# Altium PCB PCB_CAN_shield.PcbDoc
Units mil, origin at the board's own origin, x right, y up, seen from the top; angles counter-clockwise.
Board outline 2200 x 2200 mil, 2 copper layers (Top Layer, Bottom Layer), stack 61.811 mil thick; 18 components, 13 nets, 99 pads, 23 vias.
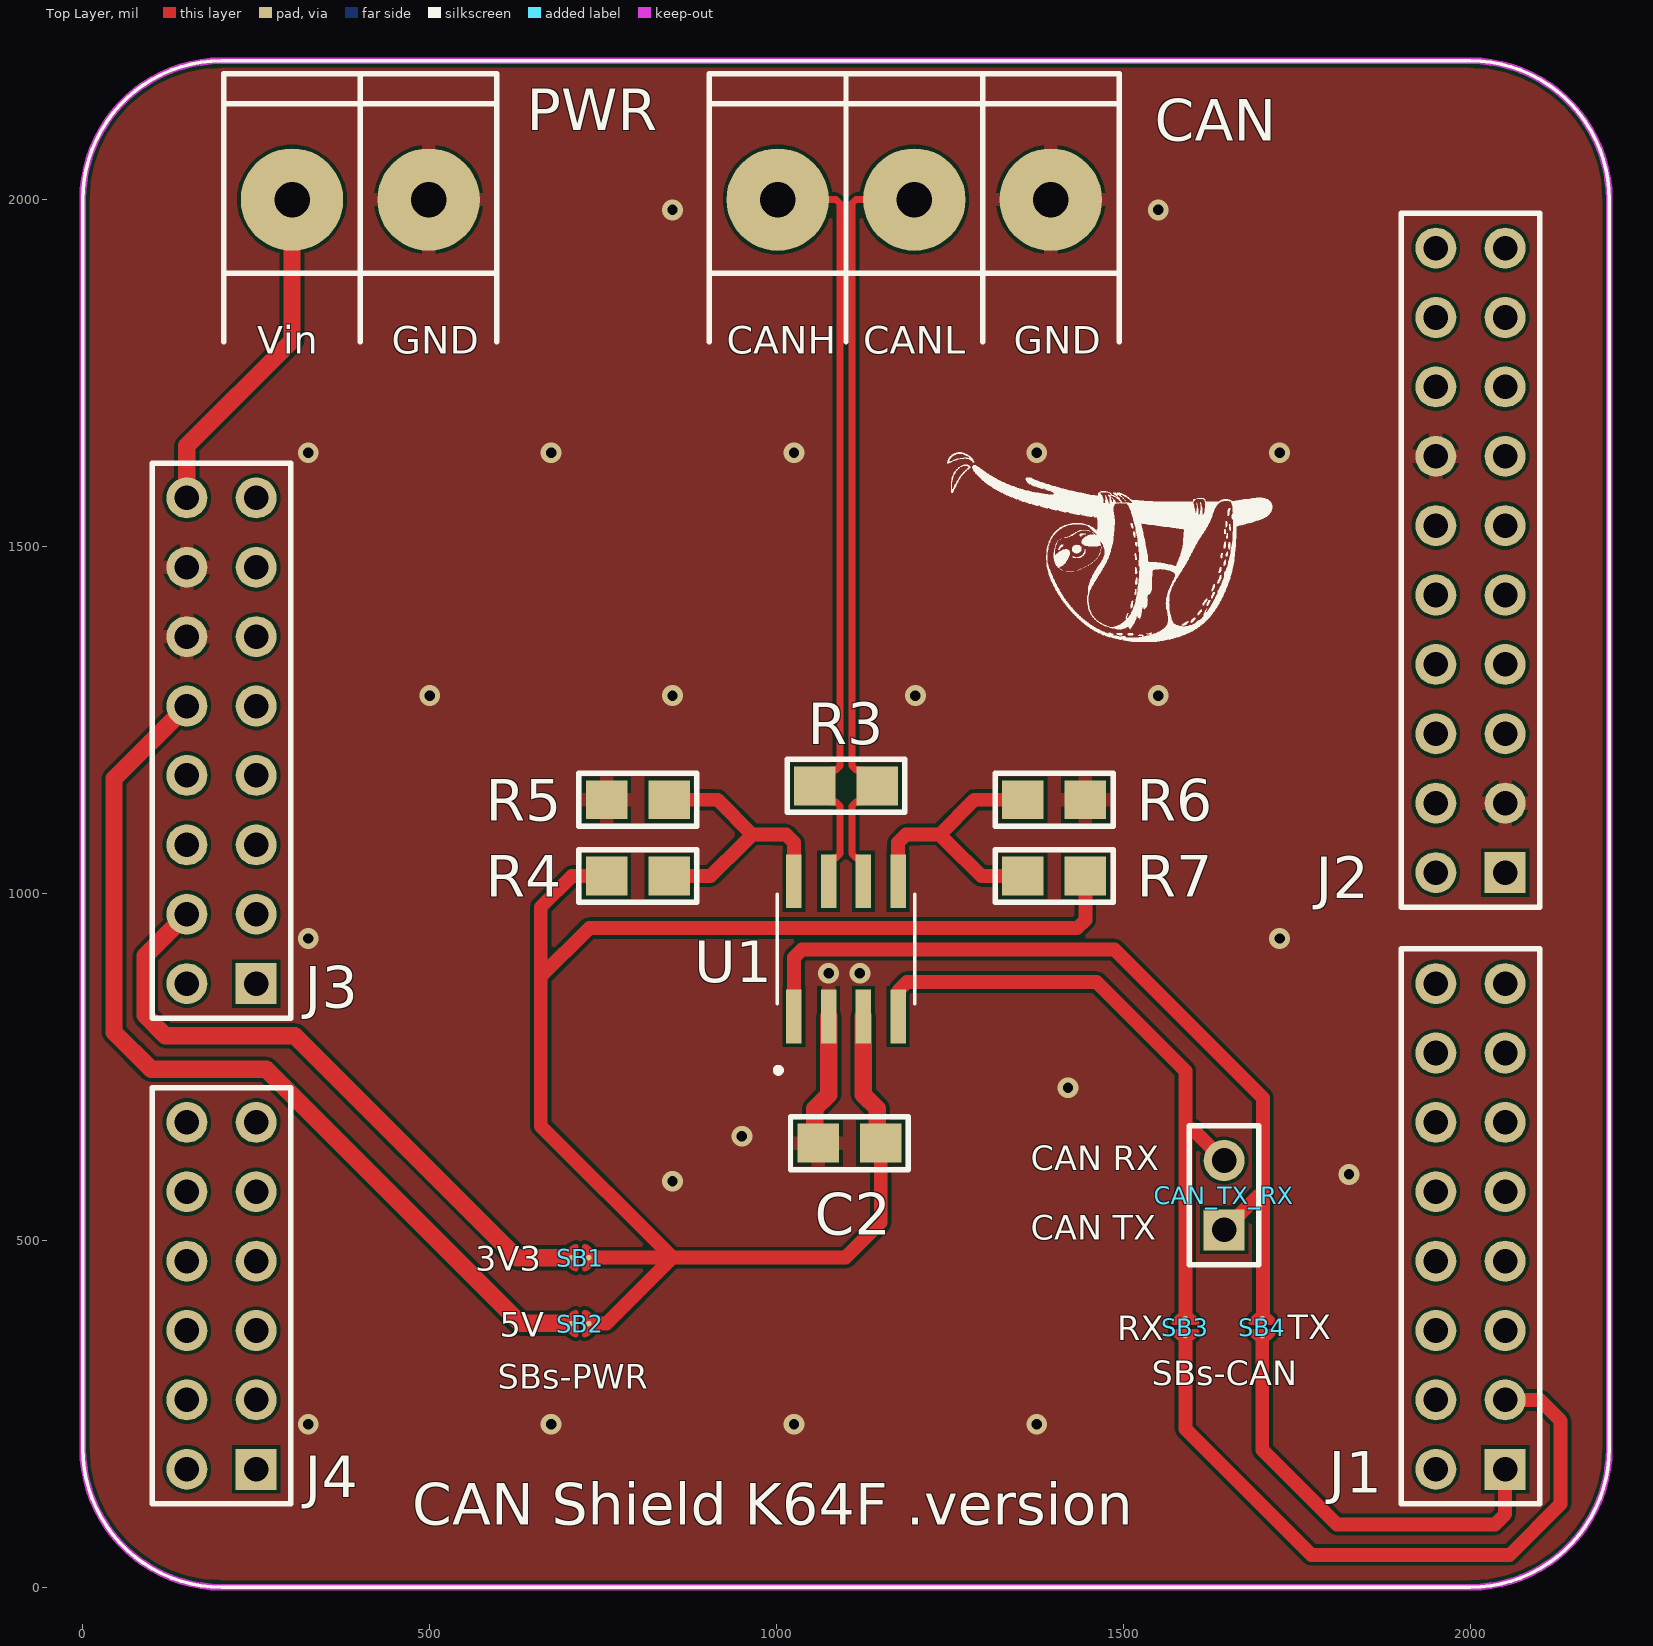
[diagram p0: Top Layer view]
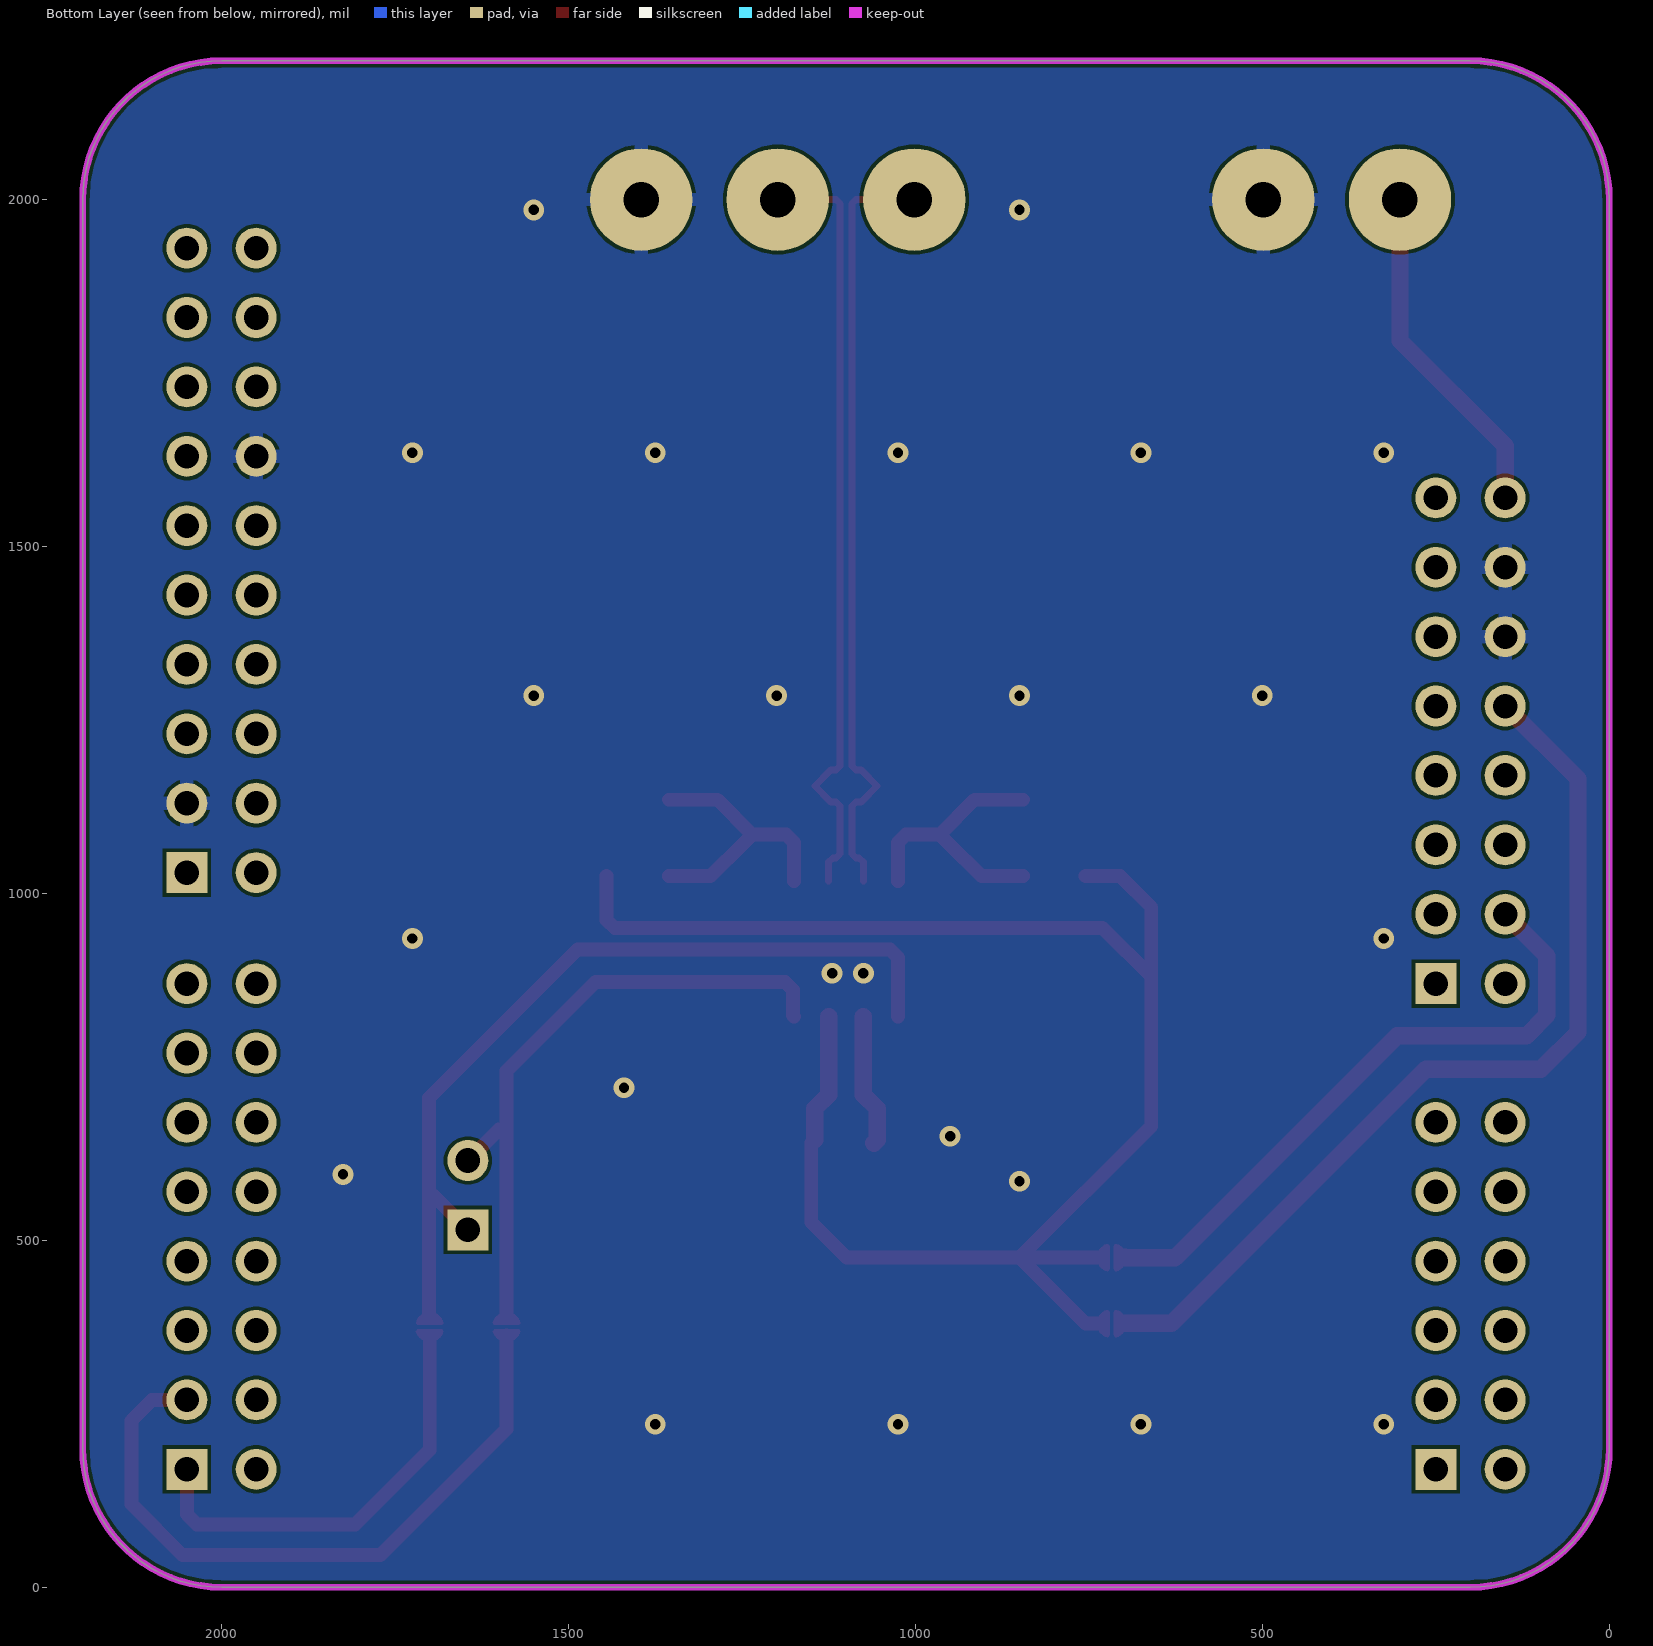
[diagram p1: Bottom Layer view, seen from below]
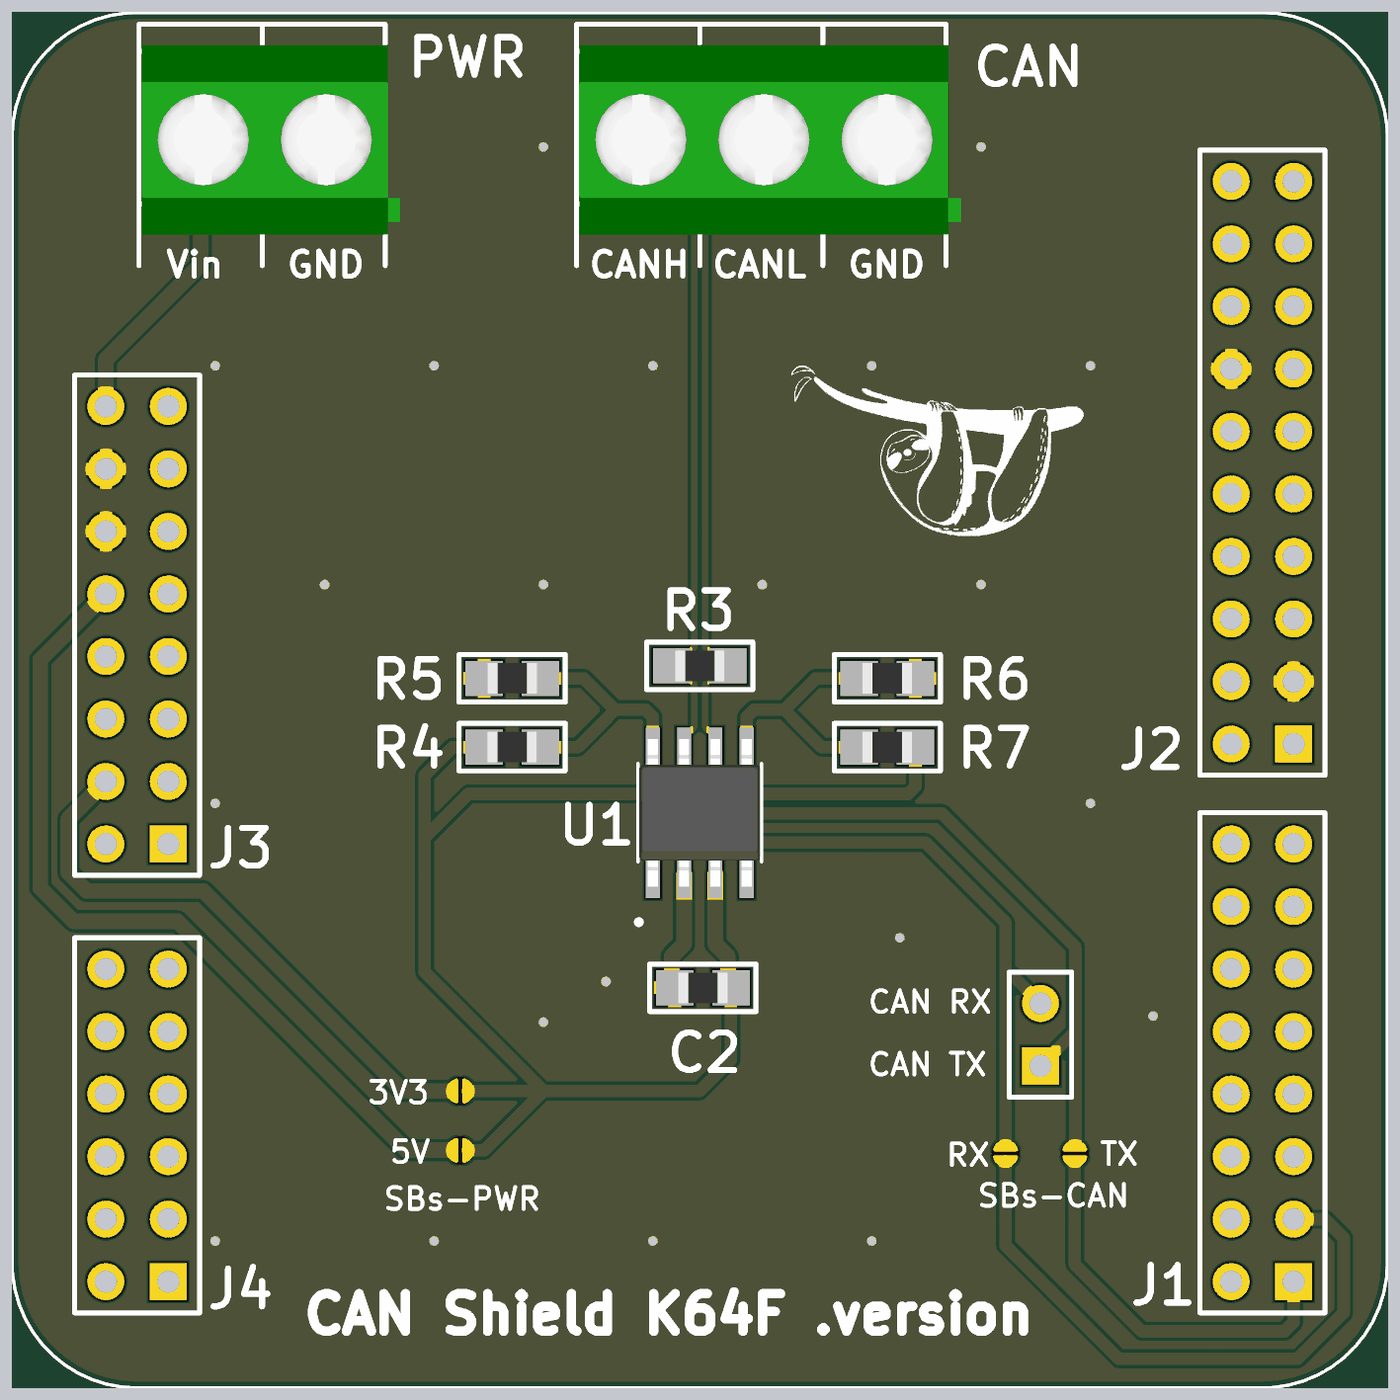
[diagram p2: 3D render of the assembled board from above, using the file's embedded part models]

## Layer stack, top to bottom
Top Solder: solder mask 0.5, Solder Resist, Dk 3.8
Top Layer: signal copper 1.378
Dielectric: core 59.0551, FR-4, Dk 4.5
Bottom Layer: signal copper 1.378
Bottom Solder: solder mask 0.5, Solder Resist, Dk 3.8

## Board outline
0,200 0,2000 cw(c200,2000) 200,2200 2000,2200 cw(c2000,2000) 2200,2000 2200,200 cw(c2000,200) 2000,0 200,0 cw(c200,200)

## Design rules (kind name [scope] priority, off if disabled: settings)
BoardOutlineClearance [All] p1: gap=7.87 ignorepadtopadclearanceinfootprint=FALSE
Clearance [All] p1: gap=5 ignorepadtopadclearanceinfootprint=FALSE except(9.84: Arc-Hole Track-Hole SMDPad-Hole THPad-Hole Via-Hole Fill-Hole Poly-Hole Region-Hole Text-Hole)
ComponentClearance [All] p1: gap=5 collisioncheckmode=3 verticalgap=5 showdistances=TRUE
DiffPairsRouting CAN0_DIF [All] p1: maxlimit=7.71 minlimit=5 mostfreqgap=7.71 toplayer_mingap=7.71 toplayer_minwidth=9.98 toplayer_maxwidth=9.98 toplayer_prefwidth=9.98 bottomlayer_maxgap=5 bottomlayer_prefgap=5 bottomlayer_minwidth=4.86 bottomlayer_maxwidth=4.86 bottomlayer_prefwidth=4.86 impedanceprofiledriven=TRUE impedanceprofileid={C74E9739-1BBD-40BA-B036-56869AD094CF} impedanceprofilevalue=120.000000 maxuncoupledlength=500
DiffPairsRouting [All] p2: maxlimit=10 minlimit=5 mostfreqgap=5 toplayer_minwidth=5 toplayer_maxwidth=1000 toplayer_prefwidth=5 bottomlayer_minwidth=5 bottomlayer_maxwidth=1000 bottomlayer_prefwidth=5 maxuncoupledlength=500
Height [All] p1: minheight=0 maxheight=71497.94 prefheight=500
HoleSize [All] p1: absolutevalues=TRUE maxlimit=248.03 minlimit=11.81 maxpercent=80.000 minpercent=20.000
HoleToHoleClearance [All] p1: gap=9.84 allowstackedmicrovias=FALSE
MinimumAnnularRing [All] p1: minimumring=3
MinimumSolderMaskSliver [All] p1: minsoldermaskwidth=0
PlaneClearance [All] p1: clearance=5
PlaneConnect [All] p1: pad.planeconnectstyle=Relief pad.reliefexpansion=11.81 pad.reliefentries=4 pad.reliefconductorwidth=10 pad.reliefairgap=5 via.planeconnectstyle=Direct via.reliefexpansion=11.81 via.reliefentries=4 via.reliefconductorwidth=5 via.reliefairgap=5
PolygonConnect [All] p1: thpad.connectstyle=Relief thpad.reliefconductorwidth=20 thpad.reliefentries=4 thpad.polygonreliefangle="90 Angle" thpad.airgapwidth=5 smdpad.connectstyle=Relief smdpad.reliefconductorwidth=20 smdpad.reliefentries=4 smdpad.polygonreliefangle="90 Angle" smdpad.airgapwidth=5 via.connectstyle=Direct via.reliefconductorwidth=5 via.reliefentries=4 via.polygonreliefangle="90 Angle" via.airgapwidth=5
RoutingVias [All] p1: holewidth=11.81 width=23.62 viastyle="Through Hole" minholewidth=11.81 minwidth=23.62 maxholewidth=23.62 maxwidth=259.84
SilkToSilkClearance [All] p1: silktosilkclearance=0
SilkToSolderMaskClearance [IsPad] p1: minsilkscreentomaskgap=5 clearancetoexposedcopper=TRUE
SolderMaskExpansion [All] p1: expansion=2.95 istentingtop=FALSE
Width [All] p1: maxlimit=1000 minlimit=5 preferedwidth=5 minimp=50.000000 maximp=50.000000 favimp=50.000000
20 further rules are at their usual default settings.

## Classes and differential pairs
net class CAN0_D: CAN0_N CAN0_P
differential pair CAN0: +CAN0_P -CAN0_N

## Components (designator, comment, footprint, x,y, rotation, side; value= is the part's Value field where it differs from the comment)
C2 "CDecoup" 0805 1105,640 r180 top
CAN "Terminal 3" BORNERA3 1198.43,2000 r270 top
CAN_TX_RX "Header 2" HDR1X2 1645,515 r90 top
J1 "Header 8X2" HDR2X8 2050,170 r90 top locked
J2 "Header 10X2" HDR2X10 2050,1030 r90 top locked
J3 "Header 8X2" HDR2X8 250,870 r90 top locked
J4 "Header 6X2" HDR2X6 250,170 r90 top locked
PWR "Terminal 2" BORNERA2 400,2000 r270 top locked
R3 "RES" 0805 1100,1155 r180 top value=120R
R4 "DNP" 0805 800,1025 r0 top
R5 "DNP" 0805 800,1135 r180 top
R6 "DNP" 0805 1400,1135 r0 top
R7 "DNP" 0805 1400,1025 r180 top
SB1 "Solderbridge" Solderbridge#1 716.98,474.96 r180 top
SB2 "Solderbridge" Solderbridge#2 716.98,379.96 r180 top
SB3 "Solderbridge" Solderbridge#1 1589.14,375 r90 top
SB4 "Solderbridge" Solderbridge#1 1700,375 r90 top
U1 "TCAN332DR" SOIC127P600X175-8N 1100,920 r90 top

## Footprints (in the part's own frame and the unit in brackets; to place one, negate y for a bottom-side part, rotate by r counter-clockwise, add the part's x,y. Pads: shape width x height; smd on the part's side, far side on the other; paste and mask are expansions set on the pad)
0805 [mil] "Pasivo 0805"
  rect 60x56 smd: 1(-45,0) 2(45,0)
  silkscreen extent -85,-38 85,38, body extent -40,-25 39,25, height 15
BORNERA2 [mm] "Bornera con Tornillos 5mm separación"
  round 3.75 hole 1.3: 1(0,2.5) 2(0,-2.5)
  silkscreen extent -4.6,-5 5.2,5, body extent -3.76,-4.89 3.94,5.61, height 10
BORNERA3 [mm] "Bornera con Tornillos 5mm separación"
  round 3.75 hole 1.3: 1(0,5) 2(0,0) 3(0,-5)
  silkscreen extent -4.6,-7.5 5.2,7.5, body extent -3.76,-7.39 3.94,8.11, height 10.05
HDR1X2 [mm] "Connector; Header; 2 Position"
  rect 1.5x1.5 hole 0.9: 1(0,0)
  round 1.5 hole 0.9: 2(2.54,0)
  silkscreen extent -1.27,-1.27 3.81,1.27
HDR2X6 [mm] "Connector; Header; 6x2 Position"
  rect 1.5x1.5 hole 0.9: 1(0,0)
  round 1.5 hole 0.9: 2(0,2.54) 3(2.54,0) 4(2.54,2.54) 5(5.08,0) 6(5.08,2.54) 7(7.62,0) 8(7.62,2.54) 9(10.16,0) 10(10.16,2.54) 11(12.7,0) 12(12.7,2.54)
  silkscreen extent -1.27,-1.27 13.97,3.81
HDR2X8 [mm] "Connector; Header; 8x2 Position"
  rect 1.5x1.5 hole 0.9: 1(0,0)
  round 1.5 hole 0.9: 2(0,2.54) 3(2.54,0) 4(2.54,2.54) 5(5.08,0) 6(5.08,2.54) 7(7.62,0) 8(7.62,2.54) 9(10.16,0) 10(10.16,2.54) 11(12.7,0) 12(12.7,2.54) 13(15.24,0) 14(15.24,2.54) 15(17.78,0) 16(17.78,2.54)
  silkscreen extent -1.27,-1.27 19.05,3.81
HDR2X10 [mm] "Connector; Header; 10x2 Position"
  rect 1.5x1.5 hole 0.9: 1(0,0)
  round 1.5 hole 0.9: 2(0,2.54) 3(2.54,0) 4(2.54,2.54) 5(5.08,0) 6(5.08,2.54) 7(7.62,0) 8(7.62,2.54) 9(10.16,0) 10(10.16,2.54) 11(12.7,0) 12(12.7,2.54) 13(15.24,0) 14(15.24,2.54) 15(17.78,0) 16(17.78,2.54) 17(20.32,0) 18(20.32,2.54) 19(22.86,0) 20(22.86,2.54)
  silkscreen extent -1.27,-1.27 24.13,3.81
SOIC127P600X175-8N [mm]
  rect 1.97x0.57 smd: 1(-2.475,1.905) 2(-2.475,0.635) 3(-2.475,-0.635) 4(-2.475,-1.905) 5(2.475,-1.905) 6(2.475,-0.635) 7(2.475,0.635) 8(2.475,1.905)
  silkscreen extent -4.54,-2.51 2,2.57, body extent -3,-2.45 3,2.45, height 1.73
Solderbridge#1 [mm]
  round 0.2 smd paste-10: 1(-0.312,0) 2(0.312,0)
  Top Layer region: -0.077,-0.432 -0.152,-0.505 -0.271,-0.467 -0.335,-0.424 -0.409,-0.351 -0.462,-0.292 -0.521,-0.193 -0.549,-0.099 -0.544,0.122 -0.518,0.193 -0.434,0.33 -0.351,0.411 -0.259,0.469 -0.157,0.5 -0.107,0.483 -0.077,0.43
  Top Layer region: 0.077,0.432 0.152,0.505 0.271,0.467 0.335,0.424 0.409,0.351 0.462,0.292 0.521,0.193 0.549,0.099 0.544,-0.122 0.518,-0.193 0.434,-0.33 0.351,-0.411 0.259,-0.469 0.157,-0.5 0.107,-0.483 0.077,-0.43
  Top Layer lines w0.152: 0.153,0.431 cw(c0.042,0) 0.487,-0.01 cw(c0.042,0) 0.153,-0.431 ; -0.153,0.431 ccw(c-0.042,0) -0.487,0 ccw(c-0.042,0) -0.153,-0.431
Solderbridge#2 [mm]
  round 0.2 smd paste-10: 1(-0.312,0) 2(0.312,0)
  Top Layer region: -0.077,-0.432 -0.152,-0.505 -0.271,-0.467 -0.335,-0.424 -0.409,-0.351 -0.462,-0.292 -0.521,-0.193 -0.549,-0.099 -0.544,0.122 -0.518,0.193 -0.434,0.33 -0.351,0.411 -0.259,0.469 -0.157,0.5 -0.107,0.483 -0.077,0.43
  Top Layer region: 0.077,0.432 0.152,0.505 0.271,0.467 0.335,0.424 0.409,0.351 0.462,0.292 0.521,0.193 0.549,0.099 0.544,-0.122 0.518,-0.193 0.434,-0.33 0.351,-0.411 0.259,-0.469 0.157,-0.5 0.107,-0.483 0.077,-0.43
  Top Layer lines w0.152: 0.153,0.431 cw(c0.042,0) 0.487,-0.01 cw(c0.042,0) 0.153,-0.431 ; -0.153,0.431 ccw(c-0.042,0) -0.487,0 ccw(c-0.042,0) -0.461,-0.149 ccw(c-0.042,0) -0.153,-0.431

## Part data
C2: library part CAP
CAN: library part "BORNERA 3"
CAN_TX_RX: "Header, 2-Pin", LatestRevisionDate=17-Jul-2002, LatestRevisionNote="Re-released for DXP Platform.", Publisher="Altium Limited"
J1 J3: "Header, 8-Pin, Dual row", LatestRevisionDate=17-Jul-2002, LatestRevisionNote="Re-released for DXP Platform.", Publisher="Altium Limited"
J2: "Header, 10-Pin, Dual row", LatestRevisionDate=17-Jul-2002, LatestRevisionNote="Re-released for DXP Platform.", Publisher="Altium Limited"
J4: "Header, 6-Pin, Dual row", LatestRevisionDate=17-Jul-2002, LatestRevisionNote="Re-released for DXP Platform.", Publisher="Altium Limited"
PWR: library part "BORNERA 2"
R4: library part RES, "Pullup"
R5 R6 R7: library part RES
SB1 SB2 SB3 SB4: library part SOLDERBRIDGE, Artikkelnr Noca=N.A., Artikkelnr Simpro=N.A., Footprint Doc=Solderbridge, LatestRevisionDate=2009-12-14, Part Number=Solderbridge, Pin Count=2, Published=2009-12-14, Publisher="Nordic Semiconductor"
U1: "3.3-V CAN Transceivers with CAN FD _Flexible Data Rate_ 8-SOIC -40 to 125", Package="SOIC-8 Texas Instruments", Availability=Unavailable, MF="Texas Instruments", MP=TCAN332DR, Price=None, SnapEDA_Link=https://www.snapeda.com/parts/TCAN332DR/Texas%20Instruments/view-part/?ref=snap

## Via types
v1: diameter 30, hole 15, Top Layer to Bottom Layer, tented both sides, 23 vias

## Nets (pads, with @x,y where several pads share a name; then routed paths per layer and width w, separated by ;. In a path a pad name is that pad's centre, name@x,y a point inside that pad or via, vN(x,y) a via of type N, cw(c..) or ccw(c..) an arc to the next point about the centre after c; other vN are vias at no path point)
3.3V: J3.4 SB1.2 | length 923.3
  Top Layer w25: J3.4 90,910 90,824.14 119.14,795 305.7,795 625.74,474.96 697.42,474.96 697.81,475.36
5-9V_VIN: J3.16 PWR.2 | length 492.8
  Top Layer w25: J3.16 150,1645 301.57,1796.57 PWR.2
5V: J3.10 SB2.2 | length 1340.1
  Top Layer w25: J3.10 45,1165 45,800 98.55,746.45 264.68,746.45 630.77,380.36 697.81,380.36
CAN0_N: CAN.2 R3.1 U1.6 | length 1116.3
  Top Layer w9.98: U1.6 1125,1045 1118.77,1051.23 1114.69,1051.23 1108.84,1057.08 1108.84,1126.14 1114.69,1131.99 1121.99,1131.99 R3.1 1121.99,1178.01 1114.69,1178.01 1108.84,1183.86 1108.84,1586.34 1108.84,1994.15 1114.69,2000 CAN.2
CAN0_P: CAN.3 R3.2 U1.7 | length 1116.3
  Top Layer w9.98: CAN.3 1085.31,2000 1091.16,1994.15 1091.16,1579.02 1091.16,1183.86 1085.31,1178.01 1078.01,1178.01 R3.2 1078.01,1131.99 1085.31,1131.99 1091.16,1126.14 1091.16,1057.08 1085.31,1051.23 1081.23,1051.23 1075,1045 U1.7
CAN_RX: CAN_TX_RX.2 SB3.2 U1.4 | length 932.2
  Top Layer w20: U1.4 1176.22,823.78 1176.22,860.58 1187.94,872.29 1460.98,872.29 1589.14,744.14 1589.14,660 ; 1589.14,395.86 1589.14,660 ; CAN_TX_RX.2 1600,660 1589.14,660
CAN_TX: CAN_TX_RX.1 SB4.2 U1.1 | length 1243.5
  Top Layer w20: U1.1 1025,907.33 1036.72,919.05 1487.08,919.05 1700.82,705.31 1700.82,565 ; CAN_TX_RX.1 1695,565 1700.82,565 ; 1700.82,392.3 1700.82,565
GND: C2.2 CAN.1 J2.3 J2.14 J3.12 J3.14 PWR.1 R5.2 R6.2 U1.2 | length 192.9
  Top Layer w25: C2.2 1055,645 1055,690 1075,710 U1.2
  other v1: 325,235 675,235 1025,235 1375,235 850,585 1825,595 950,650 1420,720 1075,885 1120,885 325,935 1725,935 500,1285 850,1285 1200,1285 1550,1285 325,1635 675,1635 1025,1635 1375,1635 1725,1635 850,1985 1550,1985
NetJ1_1: J1.1 SB4.1 | length 623.3
  Top Layer w20: 1700,355.83 1700,198.03 1807.53,90.5 2035.36,90.5 2050,105.15 J1.1
NetJ1_3: J1.3 SB3.1 | length 993.4
  Top Layer w20: SB3.1 1589.14,355.83 1589.14,228.18 1770.71,46.61 2056.61,46.61 2130,120 2130,240 2100,270 J1.3
NetR4_2: R4.2 R5.1 U1.8 | length 407
  Top Layer w20: R4.2 905,1025 952.69,1072.69 952.69,1072.74 959.97,1080.03 965,1085.05 993.23,1085.05 993.28,1085 1013.28,1085 1025,1073.28 U1.8 ; R5.1 914.78,1135 965.4,1084.37
NetR6_1: R6.1 R7.2 U1.5 | length 407
  Top Layer w20: U1.5 1175,1073.28 1186.72,1085 1206.72,1085 1206.77,1085.05 1235,1085.05 1240.03,1080.03 1247.31,1072.74 1247.31,1072.69 1295,1025 R7.2 ; 1234.6,1084.37 1285.22,1135 R6.1
V_CAN: C2.1 R4.1 R7.1 SB1.1 SB2.1 U1.3 | length 2481.5
  Top Layer w20: SB2.1 736.15,379.96 755,379.96 850,474.96 ; SB1.1 736.15,474.96 777.06,474.96 850,474.96 ; R4.1 705,1025 660,980 660,880 ; C2.1 1150,525.41 1099.55,474.96 850,474.96 ; R7.1 1445,961.9 1433.28,950.18 730.18,950.18 660,880 ; 660,880 660,664.96 850,474.96
  Top Layer w25: U1.3 1125,710 1145,690 C2.1@1145,645
pads on no net: J1.2 J1.4 J1.5 J1.6 J1.7 J1.8 J1.9 J1.10 J1.11 J1.12 J1.13 J1.14 J1.15 J1.16 J2.1 J2.2 J2.4 J2.5 J2.6 J2.7 J2.8 J2.9 J2.10 J2.11 J2.12 J2.13 J2.15 J2.16 J2.17 J2.18 J2.19 J2.20 J3.1 J3.2 J3.3 J3.5 J3.6 J3.7 J3.8 J3.9 J3.11 J3.13 J3.15 J4.1 J4.2 J4.3 J4.4 J4.5 J4.6 J4.7 J4.8 J4.9 J4.10 J4.11 J4.12

## Polygon pours and split planes (outlines as drawn)
GND on Top Layer "GND_L01_P000" (solid, pour order 0): 0,0 2200,0 2200,2200 0,2200
GND on Bottom Layer "GND_L02_P004" (solid, pour order 4): 0,0 2200,0 2200,2200 0,2200

## Keep-outs
Keep-Out Layer:
  the board outline again, w10

## Silkscreen, mask and mechanical layers (free items; w line width, h text height)
Top Overlay:
  drawing of 45 lines, arcs and shapes, not listed
  text "Vin" at 251.59,1778 h40
  text "GND" at 445.11,1778 h40
  text "CANH" at 928.26,1778 h40
  text "CANL" at 1125.12,1778 h40
  text "GND" at 1341.96,1778 h40
  text "CAN RX" at 1366,601 h35
  text "CAN TX" at 1366,501 h35
  text "3V3" at 566,456 h35
  text "5V" at 601,361 h35
  text "TX" at 1736.86,357.67 h35
  text "RX" at 1491,356 h35
  text "SBs-CAN" at 1541,291 h35
  text "SBs-PWR" at 598.37,286 h35
  text "CAN Shield K64F .version" at 475.2,90 h60